# Altium PCB LimeSDR-Micro_mPCIe_1v4.PcbDoc (part 4 of 11)
Units mm, origin at the board's own origin, x right, y up, seen from the top; angles counter-clockwise.
Board outline 50.8 x 29.7 mm, 8 copper layers (Top, L2, L3, L4, L5, L6, L7, Bottom), stack 0.925 mm thick; 664 components, 386 nets, 2358 pads, 843 vias.
Unrouted connection lines stored in the file: 28.
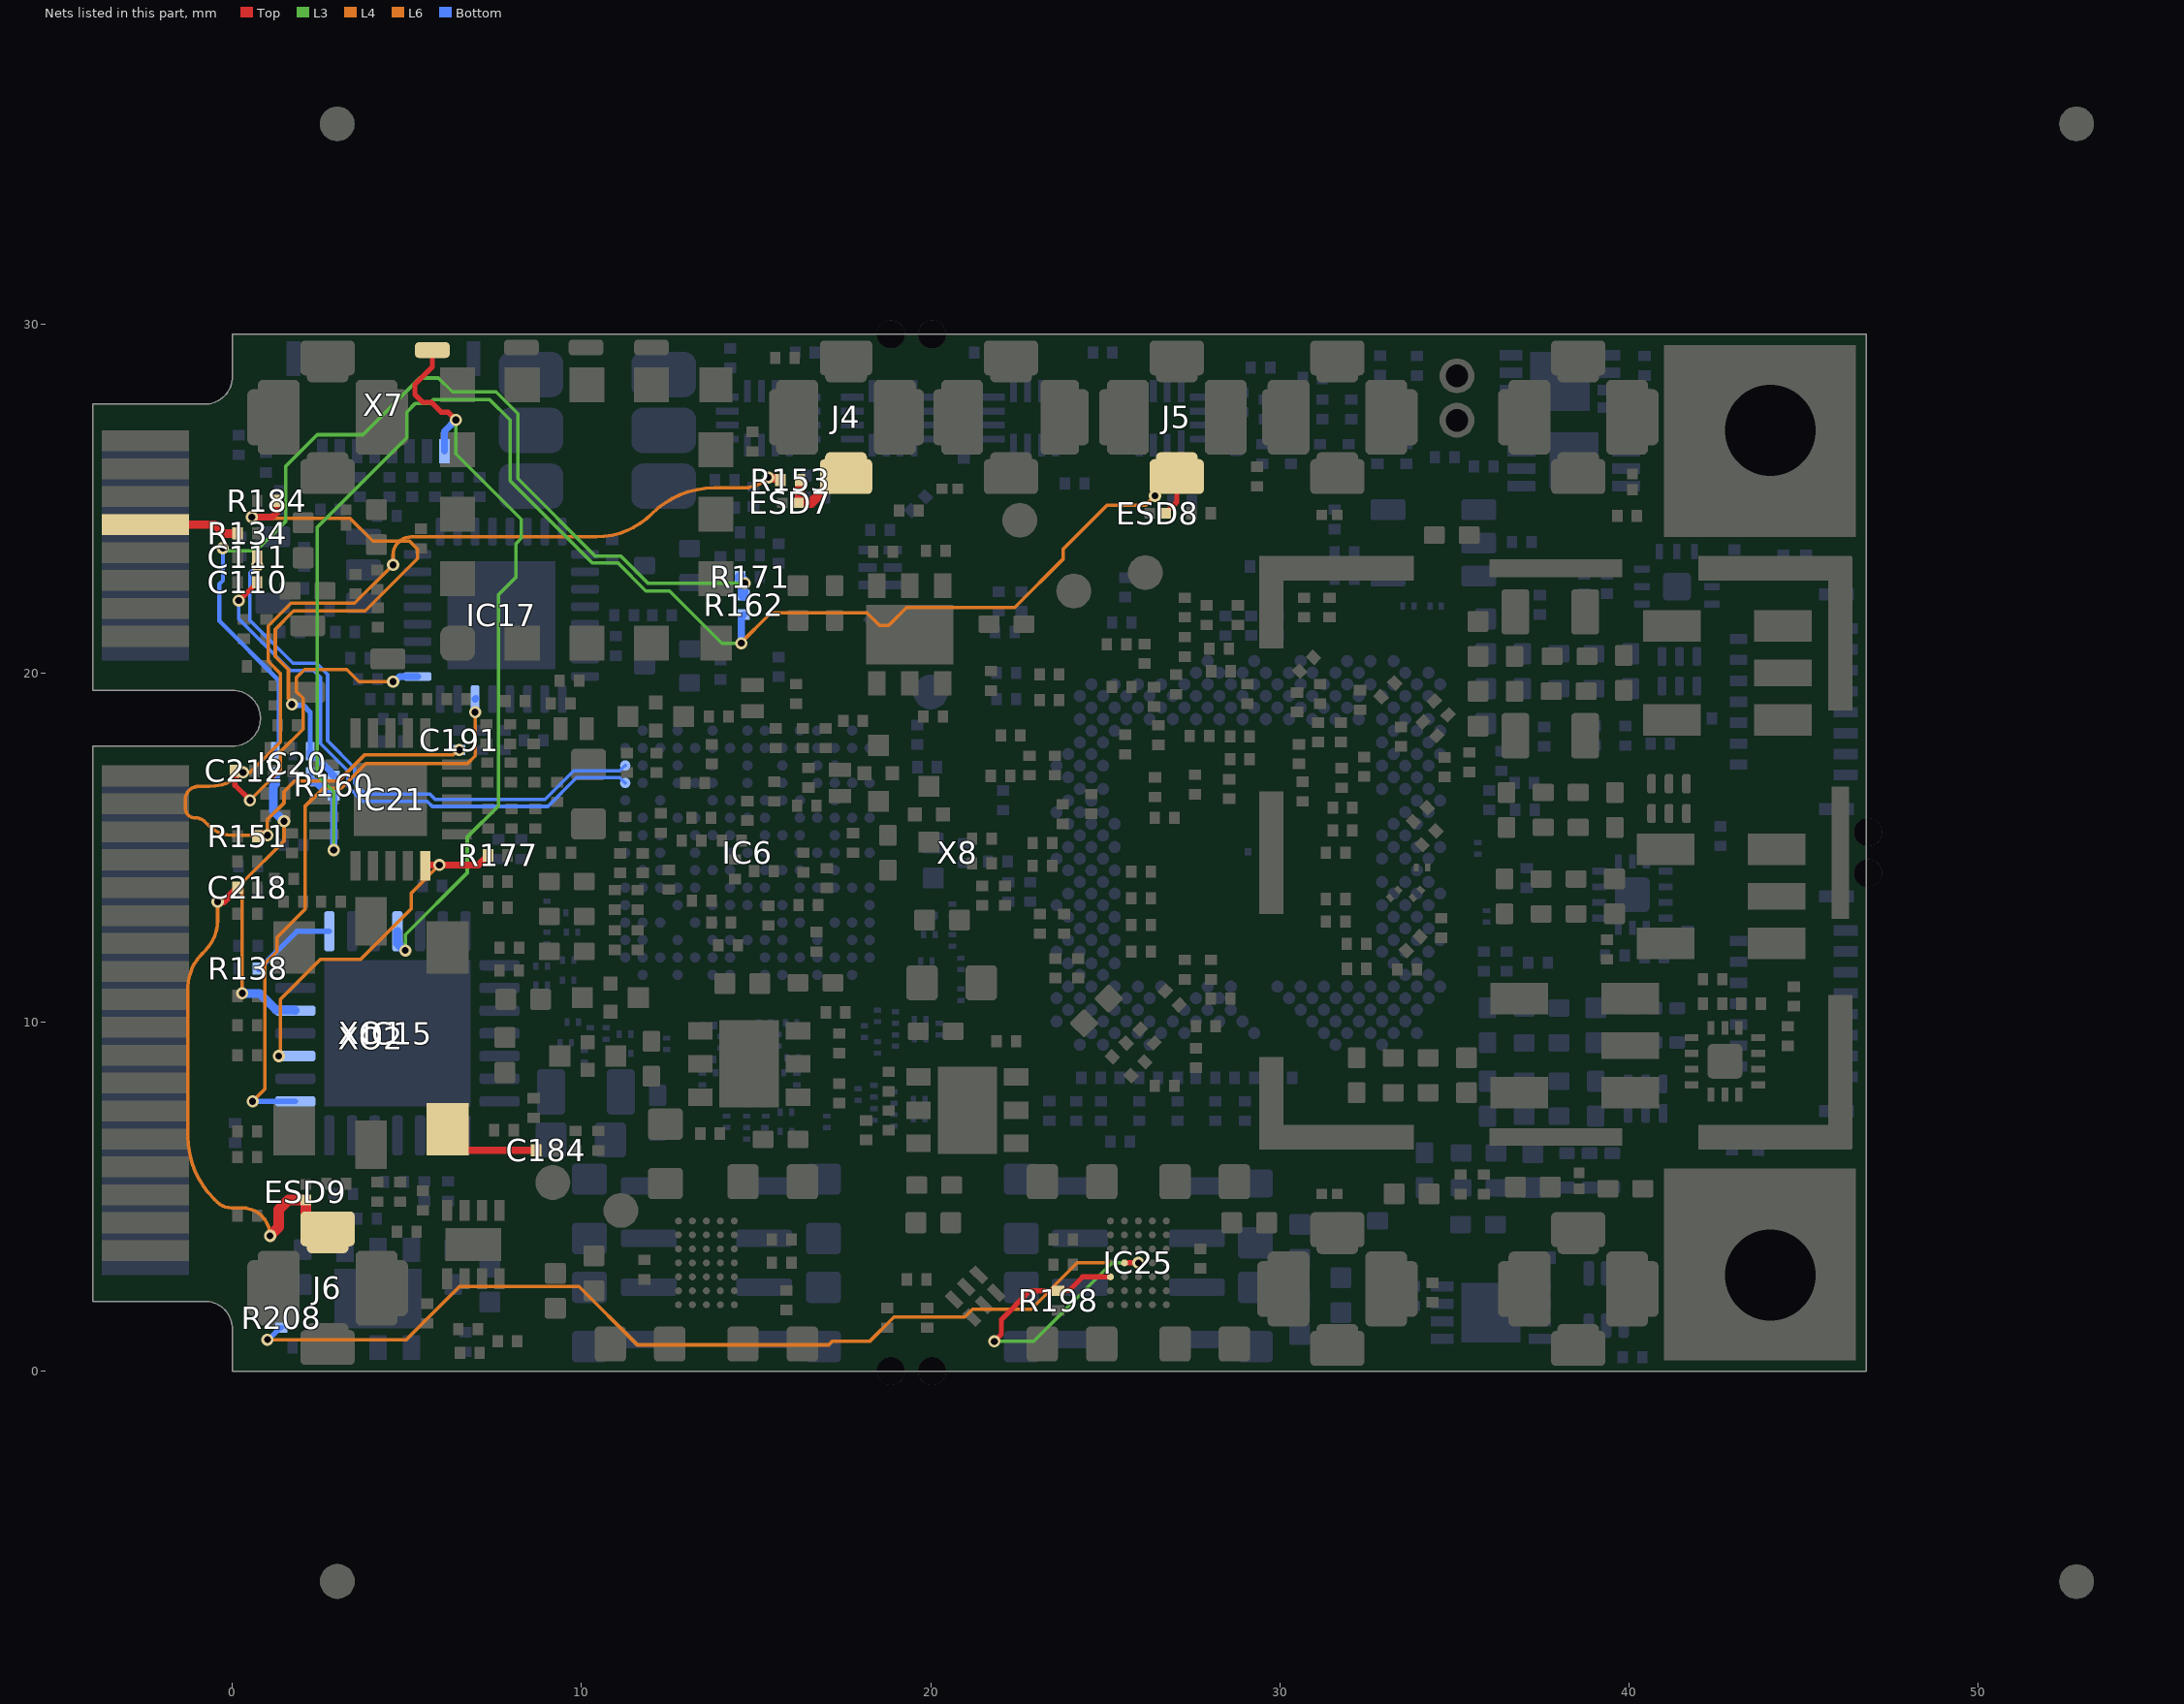
[diagram p9: the nets of this part, all layers, seen from the top]

## Part data (continued)
MN13: library part Cap_0402, Capacitance=2, Capacitance Tolerance="± 0.1", Ceramic Capacitor Case="0402 [1005 Metric]", Dielectric Characteristic="C0G / NP0", Manufacturer=AVX, Manufacturer Part Number 1=04025U2R0BAT2A, Operating Temperature Max=125, Operating Temperature Min=-55, Supplier Part Number 1=2332536, Voltage Rating=50, Capacitance Tolerance ±="± 0.1", MSL="MSL 1 - Unlimited", Packaging="Cut Tape", Part Description="SMD Multilayer Ceramic Capacitor, U Series, 2 pF, ± 0.1pF, C0G / NP0, 50 V, 0402 [1005 Metric]", Product Range="U Series", RoHS=YES, Supplier 1=Farnell, SVHC="No SVHC (17-Dec-2014)"
MN15 MN16 MN21 MN22: library part Cap_0402, Capacitance=470pF, Manufacturer="TDK Corporation", Manufacturer Part Number=C1005C0G1H471J050BA, Operating Temperature="-55°C ~ 125°C", Package / Case="0402 (1005 Metric)", Ratings=-, Supplier Part Number 1=445-2656-6-ND, Temperature Coefficient="C0G, NP0", Tolerance=±5%, Voltage - Rated=50V, Applications="General Purpose", Category=Capacitors, Features=-, Height - Seated (Max)=-, Lead Spacing=-, Lead Style=-, Manufacturer Part Number 1=C1005C0G1H471J050BA, Mounting Type="Surface Mount, MLCC", Packaging=Digi-Reel®, Part Description="470pF ±5% 50V Ceramic Capacitor C0G, NP0 0402 (1005 Metric)", RoHS="RoHS Compliant", Size / Dimension="0.039\" L x 0.020\" W (1.00mm x 0.50mm)", Supplier 1=Digi-Key, Thickness (Max)="0.022\" (0.55mm)"
MN31 MN32 MN37 MN38: library part Cap_0402, Capacitance=100pF, Manufacturer=Yageo, Manufacturer Part Number 1=CC0402JRNPO9BN101, Operating Temperature="-55°C ~ 125°C", Package / Case="0402 (1005 Metric)", Ratings=-, Supplier Part Number 1=311-1024-1-ND, Temperature Coefficient="C0G, NP0", Tolerance=±5%, Voltage - Rated=50V, Applications="General Purpose", Category=Capacitors, Features=-, Height - Seated (Max)=-, Lead Spacing=-, Lead Style=-, Mounting Type="Surface Mount, MLCC", Packaging="Cut Tape (CT)", Part Description="100pF ±5% 50V C0G, NP0 Ceramic Capacitor -55°C ~ 125°C Surface Mount, MLCC 0402 (1005 Metric) 0.039\" L x 0.020\" W (1.00mm x 0.50mm)", RoHS="RoHS Compliant", Size / Dimension="0.039\" L x 0.020\" W (1.00mm x 0.50mm)", Supplier 1=Digi-Key, Thickness (Max)="0.022\" (0.55mm)"
MN35 MN36: library part Cap_0402, Capacitance=0.80pF, Manufacturer="Murata Electronics North America", Manufacturer Part Number 1=GRM1555C1HR80BA01D, Operating Temperature="-55°C ~ 125°C", Package / Case="0402 (1005 Metric)", Ratings=-, Supplier Part Number 1=490-6269-1-ND, Temperature Coefficient="C0G, NP0", Tolerance=±0.1pF, Voltage - Rated=50V, Applications="General Purpose", Category=Capacitors, Features=-, Height - Seated (Max)=-, Lead Spacing=-, Lead Style=-, Mounting Type="Surface Mount, MLCC", Packaging="Cut Tape (CT)", Part Description="0.80pF ±0.1pF 50V C0G, NP0 Ceramic Capacitor -55°C ~ 125°C Surface Mount, MLCC 0402 (1005 Metric) 0.039\" L x 0.020\" W (1.00mm x 0.50mm)", RoHS="RoHS Compliant", Size / Dimension="0.039\" L x 0.020\" W (1.00mm x 0.50mm)", Supplier 1=Digi-Key, Thickness (Max)="0.022\" (0.55mm)"
R1 R5 R14 R19: library part Res_0402, Manufacturer=Yageo, Manufacturer Part Number 1=RC0100FR-07243RL, Supplier Part Number 1=YAG6284CT-ND, ComponentLink1Description=http://www.yageo.com/documents/recent/PYu-RC_Group_51_RoHS_L_7.pdf, ComponentLink1URL=http://www.yageo.com/documents/recent/PYu-RC_Group_51_RoHS_L_7.pdf, ComponentLink2Description=https://datasheet.ciiva.com/2560/pyu-r-int-thick-7-2560866.pdf?src-supplier=Digi-Key, ComponentLink2URL=https://datasheet.ciiva.com/2560/pyu-r-int-thick-7-2560866.pdf?src-supplier=Digi-Key, ComponentLink3Description=https://datasheet.ciiva.com/2560/pyu-r-int-thick-7-2560867.pdf?src-supplier=Digi-Key, ComponentLink3URL=https://datasheet.ciiva.com/2560/pyu-r-int-thick-7-2560867.pdf?src-supplier=Digi-Key, ComponentLink4Description=https://datasheet.ciiva.com/2560/pyu-r-int-thick-7-2560865.pdf?src-supplier=Digi-Key, ComponentLink4URL=https://datasheet.ciiva.com/2560/pyu-r-int-thick-7-2560865.pdf?src-supplier=Digi-Key, ComponentLink5Description=https://datasheet.ciiva.com/8887/pyu-rc0201-51-rohs-l-8-8887865.pdf?src-supplier=Avnet, ComponentLink5URL=https://datasheet.ciiva.com/8887/pyu-rc0201-51-rohs-l-8-8887865.pdf?src-supplier=Avnet, ComponentLink6Description=https://datasheet.ciiva.com/2471/pyu-rc0100-51-rohs-l-0-2471973.pdf?src-supplier=Digi-Key, ComponentLink6URL=https://datasheet.ciiva.com/2471/pyu-rc0100-51-rohs-l-0-2471973.pdf?src-supplier=Digi-Key, ComponentLink7Description=https://datasheet.ciiva.com/2471/pyu-rc0100-51-rohs-l-0-2471974.pdf?src-supplier=Digi-Key, ComponentLink7URL=https://datasheet.ciiva.com/2471/pyu-rc0100-51-rohs-l-0-2471974.pdf?src-supplier=Digi-Key, ComponentLink8Description=https://datasheet.ciiva.com/2471/pyu-rc0100-51-rohs-l-0-2471975.pdf?src-supplier=Digi-Key, ComponentLink8URL=https://datasheet.ciiva.com/2471/pyu-rc0100-51-rohs-l-0-2471975.pdf?src-supplier=Digi-Key, ComponentLink9Description=https://datasheet.octopart.com/RC0100FR-07243RL-Yageo-datasheet-164759695.pdf?src-supplier=Future+Electronics, ComponentLink9URL=https://datasheet.octopart.com/RC0100FR-07243RL-Yageo-datasheet-164759695.pdf?src-supplier=Future+Electronics, ComponentLink10Description=http://www.yageo.com.tw/exep/pages/download/literatures/PYu-R_INT-thick_7.pdf?src-supplier=Digi-Key, ComponentLink10URL=http://www.yageo.com.tw/exep/pages/download/literatures/PYu-R_INT-thick_7.pdf?src-supplier=Digi-Key, ComponentLink11Description=https://www.yageo.com/upload/media/product/productsearch/datasheet/rchip/PYu-RC_Group_51_RoHS_L_11.pdf?src-supplier=Digi-Key, ComponentLink11URL=https://www.yageo.com/upload/media/product/productsearch/datasheet/rchip/PYu-RC_Group_51_RoHS_L_11.pdf?src-supplier=Digi-Key, Part Description="RES 243 OHM 1% 1/32W 01005", Pricing 1="1=0,24, 10=0,126, 50=0,0866, 100=0,0746, 500=0,05474, 1000=0,0485, 5000=0,03793, 10000=0,0347 (USD)", RoHS=Yes, Stock 1=13300, Supplier 1=Digi-Key
R2 R4 R16 R18 R27 R33 R36 R41 R43 R48 R50 R57: library part Res_0402, Case Code (Imperial)=1005, Case Code (Metric)=0402, Manufacturer=Yageo, Manufacturer Part Number 1=RC0100FR-07220RL, Max Operating Temperature=125°C, Max Power Dissipation=30mW, Min Operating Temperature=-55°C, Resistance=220R, Supplier Part Number 1=YAG6275CT-ND, Temperature Coefficient=200ppm/°C, Tolerance=1%, ComponentLink1Description=http://www.yageo.com.tw/exep/pages/download/literatures/PYu-R_INT-thick_7.pdf?src-supplier=Digi-Key, ComponentLink1URL=http://www.yageo.com.tw/exep/pages/download/literatures/PYu-R_INT-thick_7.pdf?src-supplier=Digi-Key, ComponentLink2Description=http://www.yageo.com/NewPortal/yageodocoutput?fileName=/pdf/R-Chip/PYu-RC_51_RoHS_P_0.pdf&src-supplier=Digi-Key, ComponentLink2URL=http://www.yageo.com/NewPortal/yageodocoutput?fileName=/pdf/R-Chip/PYu-RC_51_RoHS_P_0.pdf&src-supplier=Digi-Key, ComponentLink3Description=https://datasheet.ciiva.com/11819/0900766b80c66297-11819479.pdf?src-supplier=RSComponents, ComponentLink3URL=https://datasheet.ciiva.com/11819/0900766b80c66297-11819479.pdf?src-supplier=RSComponents, ComponentLink4Description=https://datasheet.ciiva.com/2519/pyu-r-int-thick-7-2519001.pdf?src-supplier=Digi-Key, ComponentLink4URL=https://datasheet.ciiva.com/2519/pyu-r-int-thick-7-2519001.pdf?src-supplier=Digi-Key, ComponentLink5Description=https://datasheet.ciiva.com/2519/pyu-r-int-thick-7-2519002.pdf?src-supplier=Digi-Key, ComponentLink5URL=https://datasheet.ciiva.com/2519/pyu-r-int-thick-7-2519002.pdf?src-supplier=Digi-Key, ComponentLink6Description=https://datasheet.ciiva.com/2519/pyu-r-int-thick-7-2519000.pdf?src-supplier=Digi-Key, ComponentLink6URL=https://datasheet.ciiva.com/2519/pyu-r-int-thick-7-2519000.pdf?src-supplier=Digi-Key, ComponentLink7Description=https://datasheet.ciiva.com/7849/1018594-7849983.pdf?src-supplier=Element14, ComponentLink7URL=https://datasheet.ciiva.com/7849/1018594-7849983.pdf?src-supplier=Element14, ComponentLink8Description=https://datasheet.ciiva.com/7849/1018594-7849982.pdf?src-supplier=Element14, ComponentLink8URL=https://datasheet.ciiva.com/7849/1018594-7849982.pdf?src-supplier=Element14, ComponentLink9Description=https://datasheet.ciiva.com/8889/pyu-rc0402-51-rohs-l-6-8889306.pdf?src-supplier=Avnet, ComponentLink9URL=https://datasheet.ciiva.com/8889/pyu-rc0402-51-rohs-l-6-8889306.pdf?src-supplier=Avnet, ComponentLink10Description=https://datasheet.ciiva.com/16741/pyu-rc0402-51-rohs-l-6-r-16741016.pdf?src-supplier=Future+Electronics, ComponentLink10URL=https://datasheet.ciiva.com/16741/pyu-rc0402-51-rohs-l-6-r-16741016.pdf?src-supplier=Future+Electronics, ComponentLink11Description=https://datasheet.ciiva.com/15189/getdatasheetpartid-325130-15189445.pdf?src-supplier=Verical, ComponentLink11URL=https://datasheet.ciiva.com/15189/getdatasheetpartid-325130-15189445.pdf?src-supplier=Verical, ComponentLink12Description=https://datasheet.ciiva.com/22730/1678782-22730431.pdf?src-supplier=Element14, ComponentLink12URL=https://datasheet.ciiva.com/22730/1678782-22730431.pdf?src-supplier=Element14, ComponentLink13Description=https://datasheet.ciiva.com/24056/aoa0000ce2-24056777.pdf?src-supplier=Mouser, ComponentLink13URL=https://datasheet.ciiva.com/24056/aoa0000ce2-24056777.pdf?src-supplier=Mouser, Features="Moisture Resistant", Height=0.006inch, Length=0.016inch, Number of Terminations=2, Packaging="Tape and Reel", Part Description="220 Ohms ±1% 0.03W, 1/32W Chip Resistor 01005 (0402 Metric) Moisture Resistant Thick Film", Pricing 1="1=0,24, 10=0,126, 50=0,0866, 100=0,0746, 500=0,05474, 1000=0,0485, 5000=0,03793, 10000=0,0347 (USD)", RoHS=Yes, RoHS Compliant=Yes, Series=RC, Stock 1=17268, Supplier 1=Digi-Key, Width=0.008inch
R3 R17: library part Res_0402, Manufacturer=Cyntec, Manufacturer Part Number 1=PFR02S-820-FNH, Supplier Part Number 1=2037-PFR02S-820-FNHCT-ND, Part Description="RES SMD 82 OHM 1% 1/32W 01005", Pricing 1="1=0,1, 10=0,024, 50=0,015, 100=0,0125, 500=0,00848, 1000=0,00731, 5000=0,00531, 10000=0,00471 (USD)", Stock 1=53991, Supplier 1=DigiKey
R6 R9 R156: library part Res_0402, Case/Package=0201, Case Code (Metric)=0603, Manufacturer=Yageo, Manufacturer Part Number 1=RC0201FR-07100RL, Max Operating Temperature=125°C, Max Power Dissipation=50mW, Min Operating Temperature=-55°C, Package Quantity=1, Resistance=100R, Resistance Tolerance=1%, Resistor Type="Thick Film", Supplier Part Number 1=311-100MCT-ND, Temperature Coefficient=200ppm/°C, Voltage Rating=25V, Case Code (Imperial)=0201, ComponentLink1Description=http://www.yageo.com/documents/recent/PYu-RC_Group_51_RoHS_L_7.pdf, ComponentLink1URL=http://www.yageo.com/documents/recent/PYu-RC_Group_51_RoHS_L_7.pdf, ComponentLink2Description=https://datasheet.ciiva.com/2560/pyu-r-int-thick-7-2560866.pdf?src-supplier=Digi-Key, ComponentLink2URL=https://datasheet.ciiva.com/2560/pyu-r-int-thick-7-2560866.pdf?src-supplier=Digi-Key, ComponentLink3Description=https://datasheet.ciiva.com/2560/pyu-r-int-thick-7-2560867.pdf?src-supplier=Digi-Key, ComponentLink3URL=https://datasheet.ciiva.com/2560/pyu-r-int-thick-7-2560867.pdf?src-supplier=Digi-Key, ComponentLink4Description=https://datasheet.ciiva.com/2560/pyu-r-int-thick-7-2560865.pdf?src-supplier=Digi-Key, ComponentLink4URL=https://datasheet.ciiva.com/2560/pyu-r-int-thick-7-2560865.pdf?src-supplier=Digi-Key, ComponentLink5Description=https://datasheet.ciiva.com/8887/pyu-rc0201-51-rohs-l-8-8887865.pdf?src-supplier=Avnet, ComponentLink5URL=https://datasheet.ciiva.com/8887/pyu-rc0201-51-rohs-l-8-8887865.pdf?src-supplier=Avnet, Contact Plating=Tin,Matte, Features="Moisture Resistant", Height=0.01inch, Lead Free="Lead Free", Length=0.024inch, Number of Terminations=2, Packaging="Cut Tape", Part Description="100 Ohms ±1% 0.05W, 1/20W Chip Resistor 0201 (0603 Metric) Moisture Resistant Thick Film", Power Rating=50mW, Pricing 1="1=0,10000, 10=0,03700, 100=0,01530, 1000=0,00685, 2500=0,00595, 5000=0,00491 (USD)", Radiation Hardening=No, RoHS=Yes, RoHS Compliant=Yes, Series=RC, Size Code=0201, Stock 1=1625377, Supplier 1=Digi-Key, Termination=SMD/SMT, Tolerance=1%, Width=0.012inch
R7 R24 R26 R30 R68 R76 R78 R84 R88 R90 R109 R120 R121 R131 R132 R133 R136 R138 R139 R140 R141 R143 R144 R149 R150 R151 R152 R153 R154 R158 R159 R160 R162 R163 R167 R169 R172 R181 R184 R187 R191 R193 R194 R200 R203 R206 R208 R210 R229 R230 R231 R232: library part Res_0402, Case/Package=0201, Case Code (Metric)=0603, Manufacturer=Yageo, Manufacturer Part Number 1=RC0201JR-070RL, Max Operating Temperature=125°C, Max Power Dissipation=50mW, Min Operating Temperature=-55°C, Package Quantity=1, Resistance Tolerance=5%, Resistor Type="Thick Film", Supplier Part Number 1=311-0.0NCT-ND, Voltage Rating=25V, Case Code (Imperial)=0201, ComponentLink1Description=http://www.yageo.com/documents/recent/PYu-RC_Group_51_RoHS_L_7.pdf, ComponentLink1URL=http://www.yageo.com/documents/recent/PYu-RC_Group_51_RoHS_L_7.pdf, ComponentLink2Description=https://datasheet.ciiva.com/7672/1563626-7672248.pdf?src-supplier=Element14, ComponentLink2URL=https://datasheet.ciiva.com/7672/1563626-7672248.pdf?src-supplier=Element14, ComponentLink3Description=https://datasheet.ciiva.com/7672/1563626-7672247.pdf?src-supplier=Element14, ComponentLink3URL=https://datasheet.ciiva.com/7672/1563626-7672247.pdf?src-supplier=Element14, ComponentLink4Description=https://datasheet.ciiva.com/7660/1421516-7660808.pdf?src-supplier=Element14, ComponentLink4URL=https://datasheet.ciiva.com/7660/1421516-7660808.pdf?src-supplier=Element14, ComponentLink5Description=https://datasheet.ciiva.com/46391/1421516-46391340.pdf?src-supplier=Element14, ComponentLink5URL=https://datasheet.ciiva.com/46391/1421516-46391340.pdf?src-supplier=Element14, Construction=Rectangular, Contact Plating=Tin,Matte, Depth=0.3mm, Features="Moisture Resistant", Height=0.01inch, Lead Free="Lead Free", Length=0.024inch, Military Standard=Not, Number of Terminations=2, Packaging="Tape and Reel", Part Description="0 Ohms Jumper Chip Resistor 0201 (0603 Metric) Moisture Resistant Thick Film", Power Rating=50mW, Pricing 1="1=0,10000, 10=0,03700, 25=0,02680, 50=0,02020, 100=0,01500, 250=0,01140, 500=0,00912, 1000=0,00672, 5000=0,00482 (USD)", Radiation Hardening=No, Resistance=0R, RoHS=Yes, RoHS Compliant=Yes, Series=RC, Size Code=0201, Stock 1=6252381, Supplier 1=Digi-Key, Termination=SMD/SMT, Tolerance=5%, Voltage Rating (DC)=25V, Weight=6E-06oz, Width=0.012inch
R8 R10 R11 R12 R13 R25 R35 R73 R74 R77 R89 R110 R111 R112 R113 R114 R115 R116 R117 R118 R119 R130 R155 R157 R161 R177 R178 R188 R192 R196 R209 R212: library part Res_0402, Case/Package=0201, Case Code (Metric)=0603, Manufacturer=Yageo, Manufacturer Part Number 1=RC0201FR-0710KL, Max Operating Temperature=125°C, Max Power Dissipation=50mW, Min Operating Temperature=-55°C, Package Quantity=10000, Resistance=10kR, Resistance Tolerance=1%, Resistor Type="Thick Film", Supplier Part Number 1=311-10.0KMCT-ND, Temperature Coefficient=200ppm/°C, Voltage Rating=25V, Case Code (Imperial)=0201, ComponentLink1Description=https://datasheet.ciiva.com/5924/1563626-5924912.pdf?src-supplier=Farnell, ComponentLink1URL=https://datasheet.ciiva.com/5924/1563626-5924912.pdf?src-supplier=Farnell, ComponentLink2Description=https://datasheet.ciiva.com/22661/1563626-22661319.pdf?src-supplier=Element14, ComponentLink2URL=https://datasheet.ciiva.com/22661/1563626-22661319.pdf?src-supplier=Element14, ComponentLink3Description=https://datasheet.ciiva.com/7660/1421516-7660807.pdf?src-supplier=Element14, ComponentLink3URL=https://datasheet.ciiva.com/7660/1421516-7660807.pdf?src-supplier=Element14, ComponentLink4Description=https://datasheet.ciiva.com/46391/1421516-46391339.pdf?src-supplier=Element14, ComponentLink4URL=https://datasheet.ciiva.com/46391/1421516-46391339.pdf?src-supplier=Element14, ComponentLink5Description=https://datasheet.ciiva.com/2467/pyu-r-int-thick-7-2467110.pdf?src-supplier=Digi-Key, ComponentLink5URL=https://datasheet.ciiva.com/2467/pyu-r-int-thick-7-2467110.pdf?src-supplier=Digi-Key, ComponentLink6Description=https://datasheet.ciiva.com/2467/pyu-r-int-thick-7-2467111.pdf?src-supplier=Digi-Key, ComponentLink6URL=https://datasheet.ciiva.com/2467/pyu-r-int-thick-7-2467111.pdf?src-supplier=Digi-Key, ComponentLink7Description=https://datasheet.ciiva.com/2467/pyu-r-int-thick-7-2467109.pdf?src-supplier=Digi-Key, ComponentLink7URL=https://datasheet.ciiva.com/2467/pyu-r-int-thick-7-2467109.pdf?src-supplier=Digi-Key, Construction=Rectangular, Contact Plating=Tin,Matte, Depth=0.3mm, Features="Moisture Resistant", Height=0.01inch, Lead Free="Lead Free", Length=0.6mm, Military Standard=Not, Number of Pins=2, Number of Terminations=2, Packaging="Tape and Reel", Part Description="10 kOhms ±1% 0.05W, 1/20W Chip Resistor 0201 (0603 Metric) Moisture Resistant Thick Film", Power Rating=50mW, Pricing 1="1=0,10000, 10=0,03700, 100=0,01530, 1000=0,00685, 2500=0,00595, 5000=0,00491 (USD)", Radiation Hardening=No, Reach SVHC Compliant=Yes, RoHS=Yes, RoHS Compliant=Yes, Series=RC, Stock 1=17142315, Supplier 1=Digi-Key, Technology="THICK FILM", Termination=SMD/SMT, Tolerance=1%, Voltage Rating (DC)=25V, Weight=6E-06oz, Width=0.012inch, Working Voltage=25V
R20 R21 R22 R23 R79 R85 R146 R148 R166 R171 R174 R180 R182 R183: library part Res_0402, Case/Package=0201, Case Code (Metric)=0603, Manufacturer=Yageo, Manufacturer Part Number 1=RC0201FR-0747RL, Max Operating Temperature=125°C, Max Power Dissipation=50mW, Min Operating Temperature=-55°C, Resistance=47R, Resistance Tolerance=1%, Resistor Type="Thick Film", Supplier Part Number 1=YAG2694CT-ND, Temperature Coefficient=200ppm/°C, Voltage Rating=25V, Case Code (Imperial)=0201, ComponentLink1Description=https://datasheet.ciiva.com/5924/1563626-5924912.pdf?src-supplier=Farnell, ComponentLink1URL=https://datasheet.ciiva.com/5924/1563626-5924912.pdf?src-supplier=Farnell, ComponentLink2Description=https://datasheet.ciiva.com/22661/1563626-22661319.pdf?src-supplier=Element14, ComponentLink2URL=https://datasheet.ciiva.com/22661/1563626-22661319.pdf?src-supplier=Element14, Features="Moisture Resistant", Height=0.23mm, Length=0.6mm, Number of Terminations=2, Packaging="Tape and Reel", Part Description="47 Ohms ±1% 0.05W, 1/20W Chip Resistor 0201 (0603 Metric) Moisture Resistant Thick Film", Power Rating=50mW, Pricing 1="1=0,10000, 10=0,03700, 100=0,01530, 1000=0,00685, 2500=0,00595, 5000=0,00491 (USD)", Reach SVHC Compliant=Yes, RoHS=Yes, RoHS Compliant=Yes, Series=RC, Stock 1=778022, Supplier 1=Digi-Key, Termination=SMD/SMT, Tolerance=1%, Width=0.3mm
R28 R34 R37 R42 R44 R49 R51 R58 R100 R101 R102 R103 R104 R105 R106 R107: library part Res_0402, Case/Package=Molded, Case Code (Imperial)=1005, Case Code (Metric)=0402, Manufacturer=Panasonic, Manufacturer Part Number 1=ERJ-XGN0R00Y, Max Operating Temperature=125°C, Max Power Dissipation=30mW, Min Operating Temperature=-55°C, Package Quantity=1, Power Rating=31.25mW, Resistance Tolerance=1%, Resistor Type="Thick Film", Supplier Part Number 1=P0.0AWCT-ND, Temperature Coefficient=-100ppm/°C, Tolerance=5%, Voltage Rating=15V, ComponentLink1Description=http://www.yageo.com/documents/recent/PYu-RC_Group_51_RoHS_L_7.pdf, ComponentLink1URL=http://www.yageo.com/documents/recent/PYu-RC_Group_51_RoHS_L_7.pdf, ComponentLink2Description=https://datasheet.ciiva.com/7672/1563626-7672248.pdf?src-supplier=Element14, ComponentLink2URL=https://datasheet.ciiva.com/7672/1563626-7672248.pdf?src-supplier=Element14, ComponentLink3Description=https://datasheet.ciiva.com/7672/1563626-7672247.pdf?src-supplier=Element14, ComponentLink3URL=https://datasheet.ciiva.com/7672/1563626-7672247.pdf?src-supplier=Element14, ComponentLink4Description=https://datasheet.ciiva.com/7660/1421516-7660808.pdf?src-supplier=Element14, ComponentLink4URL=https://datasheet.ciiva.com/7660/1421516-7660808.pdf?src-supplier=Element14, ComponentLink5Description=https://datasheet.ciiva.com/46391/1421516-46391340.pdf?src-supplier=Element14, ComponentLink5URL=https://datasheet.ciiva.com/46391/1421516-46391340.pdf?src-supplier=Element14, ComponentLink6Description=https://datasheet.ciiva.com/5959/aoa0000ce2-5959897.pdf?src-supplier=Farnell, ComponentLink6URL=https://datasheet.ciiva.com/5959/aoa0000ce2-5959897.pdf?src-supplier=Farnell, ComponentLink7Description=https://datasheet.ciiva.com/7753/1678782-7753973.pdf?src-supplier=Element14, ComponentLink7URL=https://datasheet.ciiva.com/7753/1678782-7753973.pdf?src-supplier=Element14, ComponentLink8Description=https://datasheet.ciiva.com/22765/1678782-22765015.pdf?src-supplier=Farnell, ComponentLink8URL=https://datasheet.ciiva.com/22765/1678782-22765015.pdf?src-supplier=Farnell, ComponentLink9Description=https://datasheet.ciiva.com/22667/1678782-22667862.pdf?src-supplier=Element14, ComponentLink9URL=https://datasheet.ciiva.com/22667/1678782-22667862.pdf?src-supplier=Element14, ComponentLink10Description=https://datasheet.ciiva.com/24055/aoa0000ce1-37422-24055061.pdf?src-supplier=Mouser, ComponentLink10URL=https://datasheet.ciiva.com/24055/aoa0000ce1-37422-24055061.pdf?src-supplier=Mouser, ComponentLink11Description=https://datasheet.ciiva.com/9199/aoa0000ce1-9199022.pdf?src-supplier=Avnet, ComponentLink11URL=https://datasheet.ciiva.com/9199/aoa0000ce1-9199022.pdf?src-supplier=Avnet, ComponentLink12Description=https://datasheet.ciiva.com/30177/4aoa0000ce1-30177151.pdf?src-supplier=Onlinecomponents.com, ComponentLink12URL=https://datasheet.ciiva.com/30177/4aoa0000ce1-30177151.pdf?src-supplier=Onlinecomponents.com, ComponentLink13Description=https://datasheet.ciiva.com/29928/aoa0000ce1-29928300.pdf?src-supplier=Avnet, ComponentLink13URL=https://datasheet.ciiva.com/29928/aoa0000ce1-29928300.pdf?src-supplier=Avnet, Construction=Rectangular, Contact Plating=Tin, Depth=0.2mm, Height=0.006inch, Length=0.4mm, Military Standard=Not, Mount="Surface Mount", Number of Pins=2, Number of Terminations=2, Packaging="Tape and Reel", Part Description="RES SMD 0 OHM JUMP 1/32W 01005", Pricing 1="1=0,16, 10=0,13, 25=0,0992, 50=0,072, 100=0,0507, 250=0,041, 500=0,0323, 1000=0,02236, 5000=0,01863 (USD)", Radiation Hardening=No, Reach SVHC Compliant=Unknown, Resistance=0R, RoHS=Yes, RoHS Compliant=Yes, Series=ERJ, Stock 1=2498826, Supplier 1=Digi-Key, Termination=SMD/SMT, Voltage Rating (DC)=15V, Width=0.2mm
R29 R32 R38 R40 R45 R47 R52 R56: library part Res_0402, Manufacturer=Cyntec, Manufacturer Part Number 1=PFR02S-102-FNH, Supplier Part Number 1=2037-PFR02S-102-FNHCT-ND, ComponentLink1Description=http://www.yageo.com.tw/exep/pages/download/literatures/PYu-R_INT-thick_7.pdf?src-supplier=Digi-Key, ComponentLink1URL=http://www.yageo.com.tw/exep/pages/download/literatures/PYu-R_INT-thick_7.pdf?src-supplier=Digi-Key, ComponentLink2Description=http://www.yageo.com/NewPortal/yageodocoutput?fileName=/pdf/R-Chip/PYu-RC_51_RoHS_P_0.pdf&src-supplier=Digi-Key, ComponentLink2URL=http://www.yageo.com/NewPortal/yageodocoutput?fileName=/pdf/R-Chip/PYu-RC_51_RoHS_P_0.pdf&src-supplier=Digi-Key, ComponentLink3Description=https://datasheet.ciiva.com/11819/0900766b80c66297-11819479.pdf?src-supplier=RSComponents, ComponentLink3URL=https://datasheet.ciiva.com/11819/0900766b80c66297-11819479.pdf?src-supplier=RSComponents, ComponentLink4Description=https://datasheet.ciiva.com/2519/pyu-r-int-thick-7-2519001.pdf?src-supplier=Digi-Key, ComponentLink4URL=https://datasheet.ciiva.com/2519/pyu-r-int-thick-7-2519001.pdf?src-supplier=Digi-Key, ComponentLink5Description=https://datasheet.ciiva.com/2519/pyu-r-int-thick-7-2519002.pdf?src-supplier=Digi-Key, ComponentLink5URL=https://datasheet.ciiva.com/2519/pyu-r-int-thick-7-2519002.pdf?src-supplier=Digi-Key, ComponentLink6Description=https://datasheet.ciiva.com/2519/pyu-r-int-thick-7-2519000.pdf?src-supplier=Digi-Key, ComponentLink6URL=https://datasheet.ciiva.com/2519/pyu-r-int-thick-7-2519000.pdf?src-supplier=Digi-Key, ComponentLink7Description=https://datasheet.ciiva.com/7849/1018594-7849983.pdf?src-supplier=Element14, ComponentLink7URL=https://datasheet.ciiva.com/7849/1018594-7849983.pdf?src-supplier=Element14, ComponentLink8Description=https://datasheet.ciiva.com/7849/1018594-7849982.pdf?src-supplier=Element14, ComponentLink8URL=https://datasheet.ciiva.com/7849/1018594-7849982.pdf?src-supplier=Element14, ComponentLink9Description=https://datasheet.ciiva.com/8889/pyu-rc0402-51-rohs-l-6-8889306.pdf?src-supplier=Avnet, ComponentLink9URL=https://datasheet.ciiva.com/8889/pyu-rc0402-51-rohs-l-6-8889306.pdf?src-supplier=Avnet, ComponentLink10Description=https://datasheet.ciiva.com/16741/pyu-rc0402-51-rohs-l-6-r-16741016.pdf?src-supplier=Future+Electronics, ComponentLink10URL=https://datasheet.ciiva.com/16741/pyu-rc0402-51-rohs-l-6-r-16741016.pdf?src-supplier=Future+Electronics, ComponentLink11Description=https://datasheet.ciiva.com/15189/getdatasheetpartid-325130-15189445.pdf?src-supplier=Verical, ComponentLink11URL=https://datasheet.ciiva.com/15189/getdatasheetpartid-325130-15189445.pdf?src-supplier=Verical, ComponentLink12Description=https://datasheet.ciiva.com/22730/1678782-22730431.pdf?src-supplier=Element14, ComponentLink12URL=https://datasheet.ciiva.com/22730/1678782-22730431.pdf?src-supplier=Element14, ComponentLink13Description=https://datasheet.ciiva.com/24056/aoa0000ce2-24056777.pdf?src-supplier=Mouser, ComponentLink13URL=https://datasheet.ciiva.com/24056/aoa0000ce2-24056777.pdf?src-supplier=Mouser, Part Description="RES SMD 1K OHM 1% 1/32W 01005", Pricing 1="1=0,1, 10=0,024, 50=0,015, 100=0,0125, 500=0,00848, 1000=0,00731, 5000=0,00531, 10000=0,00471 (USD)", RoHS=No, Stock 1=1788660, Supplier 1=Digi-Key
R31 R39 R46 R55: library part Res_0402, Manufacturer=Yageo, Manufacturer Part Number 1=RC0100FR-07100RL, Supplier Part Number 1=311-100DGCT-ND, ComponentLink1Description=http://www.yageo.com/documents/recent/PYu-RC_Group_51_RoHS_L_7.pdf, ComponentLink1URL=http://www.yageo.com/documents/recent/PYu-RC_Group_51_RoHS_L_7.pdf, ComponentLink2Description=https://datasheet.ciiva.com/2560/pyu-r-int-thick-7-2560866.pdf?src-supplier=Digi-Key, ComponentLink2URL=https://datasheet.ciiva.com/2560/pyu-r-int-thick-7-2560866.pdf?src-supplier=Digi-Key, ComponentLink3Description=https://datasheet.ciiva.com/2560/pyu-r-int-thick-7-2560867.pdf?src-supplier=Digi-Key, ComponentLink3URL=https://datasheet.ciiva.com/2560/pyu-r-int-thick-7-2560867.pdf?src-supplier=Digi-Key, ComponentLink4Description=https://datasheet.ciiva.com/2560/pyu-r-int-thick-7-2560865.pdf?src-supplier=Digi-Key, ComponentLink4URL=https://datasheet.ciiva.com/2560/pyu-r-int-thick-7-2560865.pdf?src-supplier=Digi-Key, ComponentLink5Description=https://datasheet.ciiva.com/8887/pyu-rc0201-51-rohs-l-8-8887865.pdf?src-supplier=Avnet, ComponentLink5URL=https://datasheet.ciiva.com/8887/pyu-rc0201-51-rohs-l-8-8887865.pdf?src-supplier=Avnet, ComponentLink6Description=https://datasheet.ciiva.com/2471/pyu-rc0100-51-rohs-l-0-2471973.pdf?src-supplier=Digi-Key, ComponentLink6URL=https://datasheet.ciiva.com/2471/pyu-rc0100-51-rohs-l-0-2471973.pdf?src-supplier=Digi-Key, ComponentLink7Description=https://datasheet.ciiva.com/2471/pyu-rc0100-51-rohs-l-0-2471974.pdf?src-supplier=Digi-Key, ComponentLink7URL=https://datasheet.ciiva.com/2471/pyu-rc0100-51-rohs-l-0-2471974.pdf?src-supplier=Digi-Key, ComponentLink8Description=https://datasheet.ciiva.com/2471/pyu-rc0100-51-rohs-l-0-2471975.pdf?src-supplier=Digi-Key, ComponentLink8URL=https://datasheet.ciiva.com/2471/pyu-rc0100-51-rohs-l-0-2471975.pdf?src-supplier=Digi-Key, Part Description="100 Ohms ±1% 0.03W, 1/32W Chip Resistor 01005 (0402 Metric) Moisture Resistant Thick Film", Pricing 1="1=0,23, 10=0,12, 50=0,0824, 100=0,0709, 500=0,05204, 1000=0,04609, 5000=0,03606, 10000=0,03298 (USD)", RoHS=Yes, Stock 1=354906, Supplier 1=Digi-Key
R53 R54 R122 R123 R124 R125 R126 R127 R128 R129 R175 R176 R185 R186 R197 R213 R215 R216: library part Res_0402, Case/Package=0201, Case Code (Metric)=0603, Manufacturer=Yageo, Manufacturer Part Number 1=RC0201FR-073K3L, Max Operating Temperature=125°C, Max Power Dissipation=50mW, Min Operating Temperature=-55°C, Package Quantity=10000, Resistance=3.3kR, Resistance Tolerance=1%, Resistor Type="Thick Film", Supplier Part Number 1=YAG2285CT-ND, Temperature Coefficient=200ppm/°C, Voltage Rating=25V, Case Code (Imperial)=0201, ComponentLink1Description=http://www.yageo.com/documents/recent/PYu-RC_Group_51_RoHS_L_7.pdf, ComponentLink1URL=http://www.yageo.com/documents/recent/PYu-RC_Group_51_RoHS_L_7.pdf, ComponentLink2Description=https://datasheet.ciiva.com/22698/1563626-22698524.pdf?src-supplier=Element14, ComponentLink2URL=https://datasheet.ciiva.com/22698/1563626-22698524.pdf?src-supplier=Element14, ComponentLink3Description=https://datasheet.ciiva.com/14985/pyu-r-int-thick-7-14985418.pdf?src-supplier=Digi-Key, ComponentLink3URL=https://datasheet.ciiva.com/14985/pyu-r-int-thick-7-14985418.pdf?src-supplier=Digi-Key, Construction=Rectangular, Depth=0.3mm, Features="Moisture Resistant", Height=0.01inch, Length=0.024inch, Military Standard=Not, Number of Terminations=2, Packaging="Tape and Reel", Part Description="3.3 kOhms ±1% 0.05W, 1/20W Chip Resistor 0201 (0603 Metric) Moisture Resistant Thick Film", Power Rating=50mW, Pricing 1="1=0,10000, 10=0,03700, 100=0,01500, 1000=0,00672, 2500=0,00583, 5000=0,00482 (USD)", RoHS=Yes, RoHS Compliant=Yes, Series=RC, Stock 1=586100, Supplier 1=Digi-Key, Termination=SMD/SMT, Tolerance=1%, Width=0.3mm
  R122 R123 R124 R125 R126 R127 R128 R129 R175 R176 R185 R186: ComponentLink4Description=https://datasheet.ciiva.com/46391/1421516-46391339.pdf?src-supplier=Element14, ComponentLink4URL=https://datasheet.ciiva.com/46391/1421516-46391339.pdf?src-supplier=Element14, ComponentLink5Description=https://datasheet.ciiva.com/2467/pyu-r-int-thick-7-2467110.pdf?src-supplier=Digi-Key, ComponentLink5URL=https://datasheet.ciiva.com/2467/pyu-r-int-thick-7-2467110.pdf?src-supplier=Digi-Key, ComponentLink6Description=https://datasheet.ciiva.com/2467/pyu-r-int-thick-7-2467111.pdf?src-supplier=Digi-Key, ComponentLink6URL=https://datasheet.ciiva.com/2467/pyu-r-int-thick-7-2467111.pdf?src-supplier=Digi-Key, ComponentLink7Description=https://datasheet.ciiva.com/2467/pyu-r-int-thick-7-2467109.pdf?src-supplier=Digi-Key, ComponentLink7URL=https://datasheet.ciiva.com/2467/pyu-r-int-thick-7-2467109.pdf?src-supplier=Digi-Key
R59 R60 R61 R87 R170: library part Res_0402, Case/Package=0201, Case Code (Metric)=0603, Manufacturer=Yageo, Manufacturer Part Number 1=RC0201FR-071KL, Max Operating Temperature=125°C, Max Power Dissipation=50mW, Min Operating Temperature=-55°C, Package Quantity=10000, Resistance=1kR, Resistance Tolerance=1%, Resistor Type="Thick Film", Supplier Part Number 1=311-1KMDKR-ND, Temperature Coefficient=200ppm/°C, Voltage Rating=25V, Case Code (Imperial)=0201, ComponentLink1Description=https://datasheet.ciiva.com/7672/1563626-7672204.pdf?src-supplier=Element14, ComponentLink1URL=https://datasheet.ciiva.com/7672/1563626-7672204.pdf?src-supplier=Element14, ComponentLink2Description=https://datasheet.ciiva.com/22698/1563626-22698505.pdf?src-supplier=Element14, ComponentLink2URL=https://datasheet.ciiva.com/22698/1563626-22698505.pdf?src-supplier=Element14, ComponentLink3Description=https://datasheet.ciiva.com/29721/pyu-r-int-thick-7-29721196.pdf?src-supplier=Digi-Key, ComponentLink3URL=https://datasheet.ciiva.com/29721/pyu-r-int-thick-7-29721196.pdf?src-supplier=Digi-Key, ComponentLink4Description=https://datasheet.ciiva.com/29721/pyu-r-int-thick-7-29721195.pdf?src-supplier=Digi-Key, ComponentLink4URL=https://datasheet.ciiva.com/29721/pyu-r-int-thick-7-29721195.pdf?src-supplier=Digi-Key, ComponentLink5Description=https://datasheet.ciiva.com/8896/pyu-rc0201-51-rohs-l-8-8896174.pdf?src-supplier=Avnet, ComponentLink5URL=https://datasheet.ciiva.com/8896/pyu-rc0201-51-rohs-l-8-8896174.pdf?src-supplier=Avnet, Construction=Rectangular, Contact Plating=Tin,Matte, Depth=0.3mm, Features="Moisture Resistant", Height=0.01inch, Lead Free="Lead Free", Length=0.024inch, Military Standard=Not, Number of Terminations=2, Packaging="Tape and Reel", Part Description="1 kOhms ±1% 0.05W, 1/20W Chip Resistor 0201 (0603 Metric) Moisture Resistant Thick Film", Power Rating=50mW, Pricing 1="1=0,10000, 10=0,03700, 100=0,01530, 1000=0,00685, 2500=0,00595, 5000=0,00491 (USD)", Radiation Hardening=No, RoHS=Yes, RoHS Compliant=Yes, Series=RC, Stock 1=9099863, Supplier 1=Digi-Key, Technology="THICK FILM", Termination=SMD/SMT, Tolerance=1%, Width=0.012inch, Working Voltage=25V
R62 R63 R64 R217: library part Res_0402, Case/Package=0201, Case Code (Metric)=0603, Manufacturer=Yageo, Manufacturer Part Number 1=RC0201FR-074K7L, Max Operating Temperature=125°C, Max Power Dissipation=50mW, Min Operating Temperature=-55°C, Package Quantity=1, Resistance=4.7kR, Resistance Tolerance=1%, Resistor Type="Thick Film", Supplier Part Number 1=311-4.70KMCT-ND, Temperature Coefficient=200ppm/°C, Voltage Rating=25V, Case Code (Imperial)=0201, ComponentLink1Description=https://datasheet.ciiva.com/5924/1563626-5924912.pdf?src-supplier=Farnell, ComponentLink1URL=https://datasheet.ciiva.com/5924/1563626-5924912.pdf?src-supplier=Farnell, ComponentLink2Description=https://datasheet.ciiva.com/22661/1563626-22661319.pdf?src-supplier=Element14, ComponentLink2URL=https://datasheet.ciiva.com/22661/1563626-22661319.pdf?src-supplier=Element14, ComponentLink3Description=https://datasheet.ciiva.com/7672/1563626-7672202.pdf?src-supplier=Element14, ComponentLink3URL=https://datasheet.ciiva.com/7672/1563626-7672202.pdf?src-supplier=Element14, ComponentLink4Description=https://datasheet.ciiva.com/2493/pyu-r-int-thick-7-2493785.pdf?src-supplier=Digi-Key, ComponentLink4URL=https://datasheet.ciiva.com/2493/pyu-r-int-thick-7-2493785.pdf?src-supplier=Digi-Key, ComponentLink5Description=https://datasheet.ciiva.com/2493/pyu-r-int-thick-7-2493786.pdf?src-supplier=Digi-Key, ComponentLink5URL=https://datasheet.ciiva.com/2493/pyu-r-int-thick-7-2493786.pdf?src-supplier=Digi-Key, ComponentLink6Description=https://datasheet.ciiva.com/2493/pyu-r-int-thick-7-2493784.pdf?src-supplier=Digi-Key, ComponentLink6URL=https://datasheet.ciiva.com/2493/pyu-r-int-thick-7-2493784.pdf?src-supplier=Digi-Key, ComponentLink7Description=https://datasheet.ciiva.com/7672/1563626-7672233.pdf?src-supplier=Element14, ComponentLink7URL=https://datasheet.ciiva.com/7672/1563626-7672233.pdf?src-supplier=Element14, ComponentLink8Description=https://datasheet.ciiva.com/2493/pyu-r-int-thick-7-2493812.pdf?src-supplier=Digi-Key, ComponentLink8URL=https://datasheet.ciiva.com/2493/pyu-r-int-thick-7-2493812.pdf?src-supplier=Digi-Key, ComponentLink9Description=https://datasheet.ciiva.com/2493/pyu-r-int-thick-7-2493813.pdf?src-supplier=Digi-Key, ComponentLink9URL=https://datasheet.ciiva.com/2493/pyu-r-int-thick-7-2493813.pdf?src-supplier=Digi-Key, ComponentLink10Description=https://datasheet.ciiva.com/2493/pyu-r-int-thick-7-2493811.pdf?src-supplier=Digi-Key, ComponentLink10URL=https://datasheet.ciiva.com/2493/pyu-r-int-thick-7-2493811.pdf?src-supplier=Digi-Key, ComponentLink11Description=https://datasheet.ciiva.com/8892/pyu-rc0201-51-rohs-l-8-8892942.pdf?src-supplier=Avnet, ComponentLink11URL=https://datasheet.ciiva.com/8892/pyu-rc0201-51-rohs-l-8-8892942.pdf?src-supplier=Avnet, Construction=Rectangular, Contact Plating=Tin,Matte, Depth=0.3mm, Features="Moisture Resistant", Height=0.01inch, Lead Free="Lead Free", Length=0.6mm, Military Standard=Not, Number of Terminations=2, Packaging="Tape and Reel", Part Description="4.7 kOhms ±1% 0.05W, 1/20W Chip Resistor 0201 (0603 Metric) Moisture Resistant Thick Film", Power Rating=50mW, Pricing 1="1=0,10000, 10=0,03700, 100=0,01530, 1000=0,00685, 2500=0,00595, 5000=0,00491 (USD)", Radiation Hardening=No, RoHS=Yes, RoHS Compliant=Yes, Series=RC, Size Code=0201, Stock 1=6149397, Supplier 1=Digi-Key, Termination=SMD/SMT, Tolerance=1%, Weight=6E-06oz, Width=0.012inch
R66 R67 R70 R71 R168: library part Res_0402, Manufacturer="Panasonic Electronic Components", Manufacturer Part Number 1=ERJ-1GEF10R0C, Operating Temperature="-55°C ~ 125°C", Package / Case="0201 (0603 Metric)", Power (Watts)="0.05W, 1/20W", Resistance (Ohms)=10, Supplier Device Package=0201, Supplier Part Number 1=P10.0ABCT-ND, Temperature Coefficient=±200ppm/°C, Tolerance=±1%, Category=Resistors, Composition="Thick Film", Features=-, Height="0.010\" (0.26mm)", Number of Terminations=2, Packaging="Cut Tape (CT)", Part Description="RES SMD 10 OHM 1% 1/20W 0201", RoHS="RoHS Compliant", Size / Dimension="0.024\" L x 0.012\" W (0.60mm x 0.30mm)", Supplier 1=Digi-Key
R72 R135 R145 R199 R214: library part Res_0402, Case/Package=0201, Case Code (Metric)=0603, Manufacturer=Yageo, Manufacturer Part Number 1=RC0201FR-07100KL, Max Operating Temperature=125°C, Max Power Dissipation=50mW, Min Operating Temperature=-55°C, Package Quantity=10000, Resistance=100kR, Resistance Tolerance=1%, Resistor Type="Thick Film", Supplier Part Number 1=311-100KMCT-ND, Temperature Coefficient=200ppm/°C, Voltage Rating=25V, Case Code (Imperial)=0201, ComponentLink1Description=https://datasheet.ciiva.com/7672/1563626-7672204.pdf?src-supplier=Element14, ComponentLink1URL=https://datasheet.ciiva.com/7672/1563626-7672204.pdf?src-supplier=Element14, ComponentLink2Description=https://datasheet.ciiva.com/22698/1563626-22698505.pdf?src-supplier=Element14, ComponentLink2URL=https://datasheet.ciiva.com/22698/1563626-22698505.pdf?src-supplier=Element14, ComponentLink3Description=https://datasheet.ciiva.com/29721/pyu-r-int-thick-7-29721196.pdf?src-supplier=Digi-Key, ComponentLink3URL=https://datasheet.ciiva.com/29721/pyu-r-int-thick-7-29721196.pdf?src-supplier=Digi-Key, ComponentLink4Description=https://datasheet.ciiva.com/29721/pyu-r-int-thick-7-29721195.pdf?src-supplier=Digi-Key, ComponentLink4URL=https://datasheet.ciiva.com/29721/pyu-r-int-thick-7-29721195.pdf?src-supplier=Digi-Key, ComponentLink5Description=https://datasheet.ciiva.com/8896/pyu-rc0201-51-rohs-l-8-8896174.pdf?src-supplier=Avnet, ComponentLink5URL=https://datasheet.ciiva.com/8896/pyu-rc0201-51-rohs-l-8-8896174.pdf?src-supplier=Avnet, ComponentLink6Description=https://datasheet.ciiva.com/7660/1421516-7660806.pdf?src-supplier=Element14, ComponentLink6URL=https://datasheet.ciiva.com/7660/1421516-7660806.pdf?src-supplier=Element14, ComponentLink7Description=https://datasheet.ciiva.com/22698/1563626-22698495.pdf?src-supplier=Element14, ComponentLink7URL=https://datasheet.ciiva.com/22698/1563626-22698495.pdf?src-supplier=Element14, ComponentLink8Description=https://datasheet.ciiva.com/46391/1421516-46391338.pdf?src-supplier=Element14, ComponentLink8URL=https://datasheet.ciiva.com/46391/1421516-46391338.pdf?src-supplier=Element14, ComponentLink9Description=https://datasheet.ciiva.com/2493/pyu-r-int-thick-7-2493770.pdf?src-supplier=Digi-Key, ComponentLink9URL=https://datasheet.ciiva.com/2493/pyu-r-int-thick-7-2493770.pdf?src-supplier=Digi-Key, ComponentLink10Description=https://datasheet.ciiva.com/2493/pyu-r-int-thick-7-2493771.pdf?src-supplier=Digi-Key, ComponentLink10URL=https://datasheet.ciiva.com/2493/pyu-r-int-thick-7-2493771.pdf?src-supplier=Digi-Key, ComponentLink11Description=https://datasheet.ciiva.com/2493/pyu-r-int-thick-7-2493769.pdf?src-supplier=Digi-Key, ComponentLink11URL=https://datasheet.ciiva.com/2493/pyu-r-int-thick-7-2493769.pdf?src-supplier=Digi-Key, ComponentLink12Description=https://datasheet.ciiva.com/26829/getdatasheetpartid-420441-26829850.pdf?src-supplier=Verical, ComponentLink12URL=https://datasheet.ciiva.com/26829/getdatasheetpartid-420441-26829850.pdf?src-supplier=Verical, Construction=Rectangular, Contact Plating=Tin,Matte, Depth=0.3mm, Features="Moisture Resistant", Height=0.01inch, Lead Free="Lead Free", Length=0.024inch, Military Standard=Not, Number of Pins=2, Number of Terminations=2, Packaging="Tape and Reel", Part Description="100 kOhms ±1% 0.05W, 1/20W Chip Resistor 0201 (0603 Metric) Moisture Resistant Thick Film", Power Rating=50mW, Pricing 1="1=0,10000, 10=0,03700, 100=0,01500, 1000=0,00672, 2500=0,00583, 5000=0,00482 (USD)", Reach SVHC Compliant=Yes, RoHS=Yes, RoHS Compliant=Yes, Series=RC, Size Code=0201, Stock 1=6001055, Supplier 1=Digi-Key, Termination=SMD/SMT, Tolerance=1%, Voltage Rating (DC)=25V, Width=0.012inch
R75: library part Res_0402, Manufacturer=Ohmite, Manufacturer Part Number 1=KDV02FR330ET, Supplier Part Number 1=273-KDV02FR330ETCT-ND, ComponentLink1Description=https://datasheet.ciiva.com/5924/1563626-5924912.pdf?src-supplier=Farnell, ComponentLink1URL=https://datasheet.ciiva.com/5924/1563626-5924912.pdf?src-supplier=Farnell, ComponentLink2Description=https://datasheet.ciiva.com/22661/1563626-22661319.pdf?src-supplier=Element14, ComponentLink2URL=https://datasheet.ciiva.com/22661/1563626-22661319.pdf?src-supplier=Element14, ComponentLink3Description=https://datasheet.ciiva.com/7672/1563626-7672202.pdf?src-supplier=Element14, ComponentLink3URL=https://datasheet.ciiva.com/7672/1563626-7672202.pdf?src-supplier=Element14, ComponentLink4Description=https://datasheet.ciiva.com/2493/pyu-r-int-thick-7-2493785.pdf?src-supplier=Digi-Key, ComponentLink4URL=https://datasheet.ciiva.com/2493/pyu-r-int-thick-7-2493785.pdf?src-supplier=Digi-Key, ComponentLink5Description=https://datasheet.ciiva.com/2493/pyu-r-int-thick-7-2493786.pdf?src-supplier=Digi-Key, ComponentLink5URL=https://datasheet.ciiva.com/2493/pyu-r-int-thick-7-2493786.pdf?src-supplier=Digi-Key, ComponentLink6Description=https://datasheet.ciiva.com/2493/pyu-r-int-thick-7-2493784.pdf?src-supplier=Digi-Key, ComponentLink6URL=https://datasheet.ciiva.com/2493/pyu-r-int-thick-7-2493784.pdf?src-supplier=Digi-Key, Part Description="330 mOhms ±1% 0.1W, 1/10W Chip Resistor 0201 (0603 Metric) Current Sense Metal Film", Pricing 1="1=0,45, 10=0,324, 25=0,26, 50=0,193, 100=0,1361, 250=0,12124, 500=0,10392, 1000=0,07918, 5000=0,06681 (USD)", RoHS=No, Stock 1=6155, Supplier 1=Digi-Key
R80: library part Res_0402, Case/Package=0201, Case Code (Metric)=0603, Manufacturer=Yageo, Manufacturer Part Number 1=RC0201FR-07698RL, Max Operating Temperature=125°C, Max Power Dissipation=50mW, Min Operating Temperature=-55°C, Resistance=698R, Supplier Part Number 1=YAG2775CT-ND, Temperature Coefficient=200ppm/°C, Tolerance=1%, Case Code (Imperial)=0201, ComponentLink1Description=https://datasheet.ciiva.com/5924/1563626-5924912.pdf?src-supplier=Farnell, ComponentLink1URL=https://datasheet.ciiva.com/5924/1563626-5924912.pdf?src-supplier=Farnell, ComponentLink2Description=https://datasheet.ciiva.com/22661/1563626-22661319.pdf?src-supplier=Element14, ComponentLink2URL=https://datasheet.ciiva.com/22661/1563626-22661319.pdf?src-supplier=Element14, ComponentLink3Description=https://datasheet.ciiva.com/7672/1563626-7672202.pdf?src-supplier=Element14, ComponentLink3URL=https://datasheet.ciiva.com/7672/1563626-7672202.pdf?src-supplier=Element14, ComponentLink4Description=https://datasheet.ciiva.com/2493/pyu-r-int-thick-7-2493785.pdf?src-supplier=Digi-Key, ComponentLink4URL=https://datasheet.ciiva.com/2493/pyu-r-int-thick-7-2493785.pdf?src-supplier=Digi-Key, ComponentLink5Description=https://datasheet.ciiva.com/2493/pyu-r-int-thick-7-2493786.pdf?src-supplier=Digi-Key, ComponentLink5URL=https://datasheet.ciiva.com/2493/pyu-r-int-thick-7-2493786.pdf?src-supplier=Digi-Key, ComponentLink6Description=https://datasheet.ciiva.com/2493/pyu-r-int-thick-7-2493784.pdf?src-supplier=Digi-Key, ComponentLink6URL=https://datasheet.ciiva.com/2493/pyu-r-int-thick-7-2493784.pdf?src-supplier=Digi-Key, ComponentLink7Description=http://www.yageo.com/documents/recent/PYu-RC_Group_51_RoHS_L_9.pdf?src-supplier=Digi-Key, ComponentLink7URL=http://www.yageo.com/documents/recent/PYu-RC_Group_51_RoHS_L_9.pdf?src-supplier=Digi-Key, ComponentLink8Description=https://www.yageo.com/upload/media/product/productsearch/datasheet/rchip/PYu-RC_Group_51_RoHS_L_11.pdf?src-supplier=Digi-Key, ComponentLink8URL=https://www.yageo.com/upload/media/product/productsearch/datasheet/rchip/PYu-RC_Group_51_RoHS_L_11.pdf?src-supplier=Digi-Key, Number of Terminations=2, Packaging="Cut Tape", Part Description="698 Ohms ±1% 0.05W, 1/20W Chip Resistor 0201 (0603 Metric) Moisture Resistant Thick Film", Pricing 1="1=0,1, 10=0,026, 50=0,0162, 100=0,0136, 500=0,0094, 1000=0,00812, 5000=0,00598 (USD)", RoHS=Yes, RoHS Compliant=Yes, Series=RC, Stock 1=63130, Supplier 1=Digi-Key
R81: library part Res_0402, Case/Package=0201, Manufacturer=Yageo, Manufacturer Part Number 1=AC0201FR-07200RL, Max Operating Temperature=155°C, Max Power Dissipation=50mW, Min Operating Temperature=-55°C, Resistance=200R, Supplier Part Number 1=YAG5171CT-ND, Temperature Coefficient=200ppm/°C, Tolerance=1%, ComponentLink1Description=https://datasheet.ciiva.com/5924/1563626-5924912.pdf?src-supplier=Farnell, ComponentLink1URL=https://datasheet.ciiva.com/5924/1563626-5924912.pdf?src-supplier=Farnell, ComponentLink2Description=https://datasheet.ciiva.com/22661/1563626-22661319.pdf?src-supplier=Element14, ComponentLink2URL=https://datasheet.ciiva.com/22661/1563626-22661319.pdf?src-supplier=Element14, ComponentLink3Description=https://datasheet.ciiva.com/7672/1563626-7672202.pdf?src-supplier=Element14, ComponentLink3URL=https://datasheet.ciiva.com/7672/1563626-7672202.pdf?src-supplier=Element14, ComponentLink4Description=https://datasheet.ciiva.com/2493/pyu-r-int-thick-7-2493785.pdf?src-supplier=Digi-Key, ComponentLink4URL=https://datasheet.ciiva.com/2493/pyu-r-int-thick-7-2493785.pdf?src-supplier=Digi-Key, ComponentLink5Description=https://datasheet.ciiva.com/2493/pyu-r-int-thick-7-2493786.pdf?src-supplier=Digi-Key, ComponentLink5URL=https://datasheet.ciiva.com/2493/pyu-r-int-thick-7-2493786.pdf?src-supplier=Digi-Key, ComponentLink6Description=https://datasheet.ciiva.com/2493/pyu-r-int-thick-7-2493784.pdf?src-supplier=Digi-Key, ComponentLink6URL=https://datasheet.ciiva.com/2493/pyu-r-int-thick-7-2493784.pdf?src-supplier=Digi-Key, ComponentLink7Description=http://www.yageo.com/NewPortal/yageodocoutput?fileName=/pdf/R-Chip/PYu-AC_51_RoHS_L_6.pdf&src-supplier=Digi-Key, ComponentLink7URL=http://www.yageo.com/NewPortal/yageodocoutput?fileName=/pdf/R-Chip/PYu-AC_51_RoHS_L_6.pdf&src-supplier=Digi-Key, ComponentLink8Description=http://www.yageo.com/NewPortal/yageodocoutput?fileName=/pdf/R-Chip/PYu-AC_51_RoHS_L_5.pdf&src-supplier=Digi-Key, ComponentLink8URL=http://www.yageo.com/NewPortal/yageodocoutput?fileName=/pdf/R-Chip/PYu-AC_51_RoHS_L_5.pdf&src-supplier=Digi-Key, Features="Moisture Resistant,Automotive AEC-Q200", Height=0.01inch, Length=0.024inch, Number of Terminations=2, Packaging="Tape and Reel", Part Description="RES SMD 200 OHM 1% 1/20W 0201", Pricing 1="1=0,1, 10=0,035, 50=0,0228, 100=0,0193, 500=0,01342, 1000=0,01169, 5000=0,0087 (USD)", RoHS=Yes, RoHS Compliant=Yes, Series=AC, Stock 1=50812, Supplier 1=Digi-Key, Width=0.012inch
R82 R86: library part Res_0402, Case/Package=0201, Case Code (Metric)=0603, Manufacturer=Yageo, Manufacturer Part Number 1=RC0201FR-076R8L, Max Operating Temperature=125°C, Max Power Dissipation=50mW, Min Operating Temperature=-55°C, Resistance=6.8R, Resistance Tolerance=1%, Resistor Type="Thick Film", Supplier Part Number 1=13-RC0201FR-076R8LCT-ND, Temperature Coefficient=350ppm/°C, Case Code (Imperial)=0201, ComponentLink1Description=https://datasheet.ciiva.com/22661/1563626-22661333.pdf?src-supplier=Element14, ComponentLink1URL=https://datasheet.ciiva.com/22661/1563626-22661333.pdf?src-supplier=Element14, Features="Moisture Resistant", Height=0.01inch, Length=0.024inch, Number of Terminations=2, Packaging="Tape and Reel", Part Description="RES 6.8 OHM 1% 1/20W 0201", Power Rating=50mW, Pricing 1="1=0,1, 10=0,036, 50=0,023, 100=0,0194, 500=0,01352, 1000=0,01177, 5000=0,00876 (USD)", Reach SVHC Compliant=Unknown, RoHS=Yes, RoHS Compliant=Yes, Series=RC, Stock 1=33604, Supplier 1=Digi-Key, Tolerance=1%, Width=0.012inch